# EAGLE board devboard_kw2xd_v2.0 (EAGLE 8.4.1)
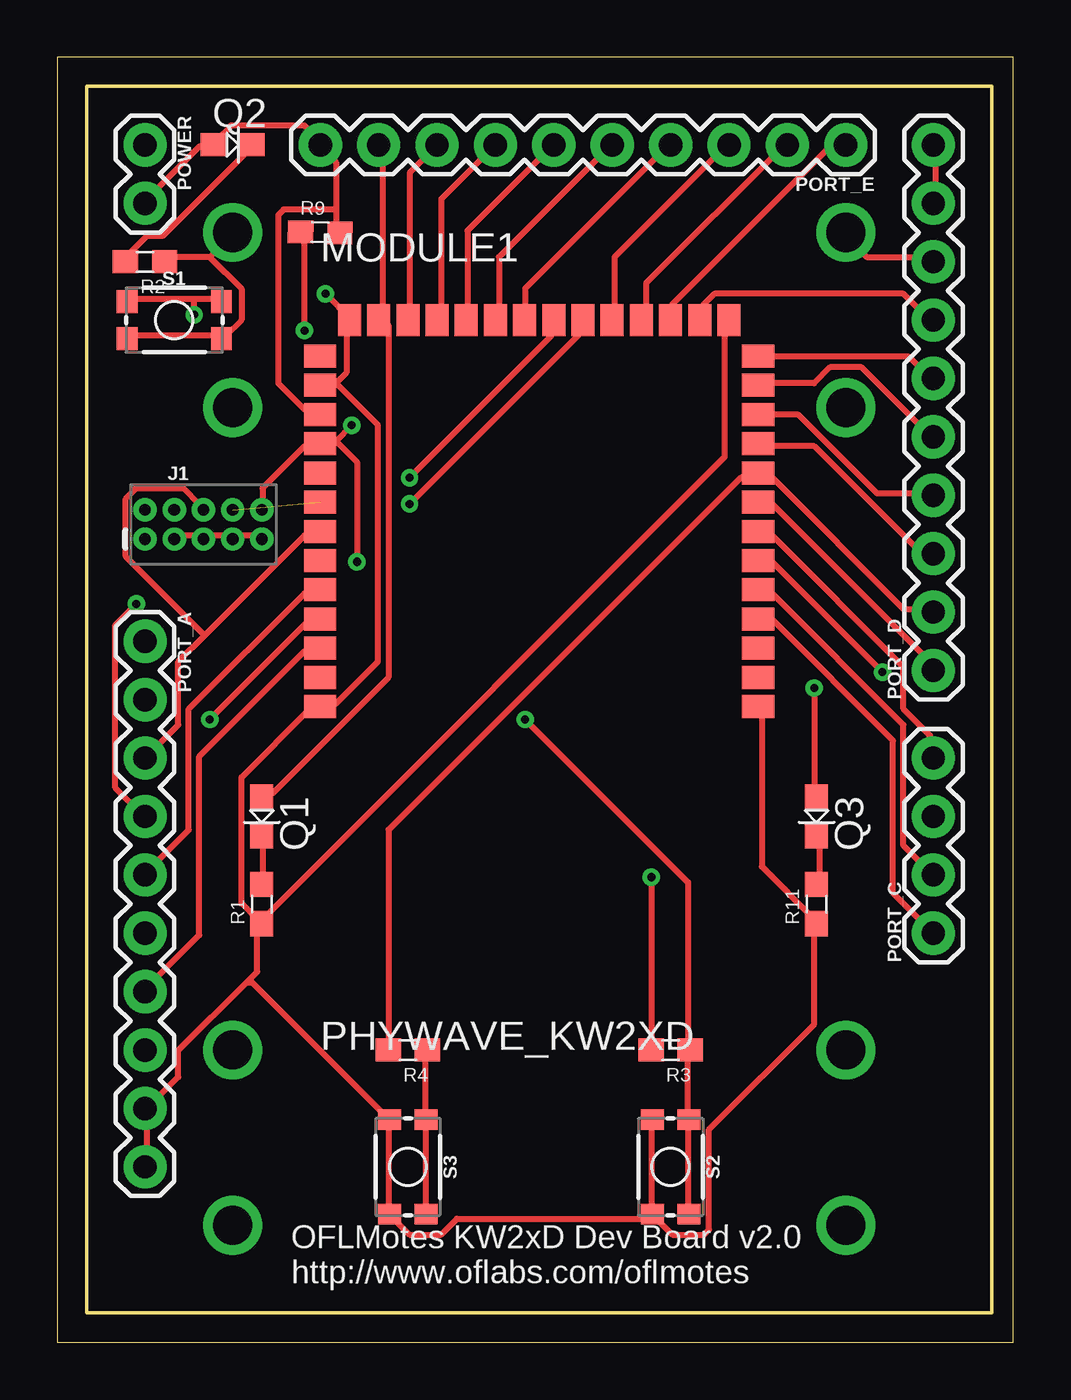
[diagram p0: board, top side]
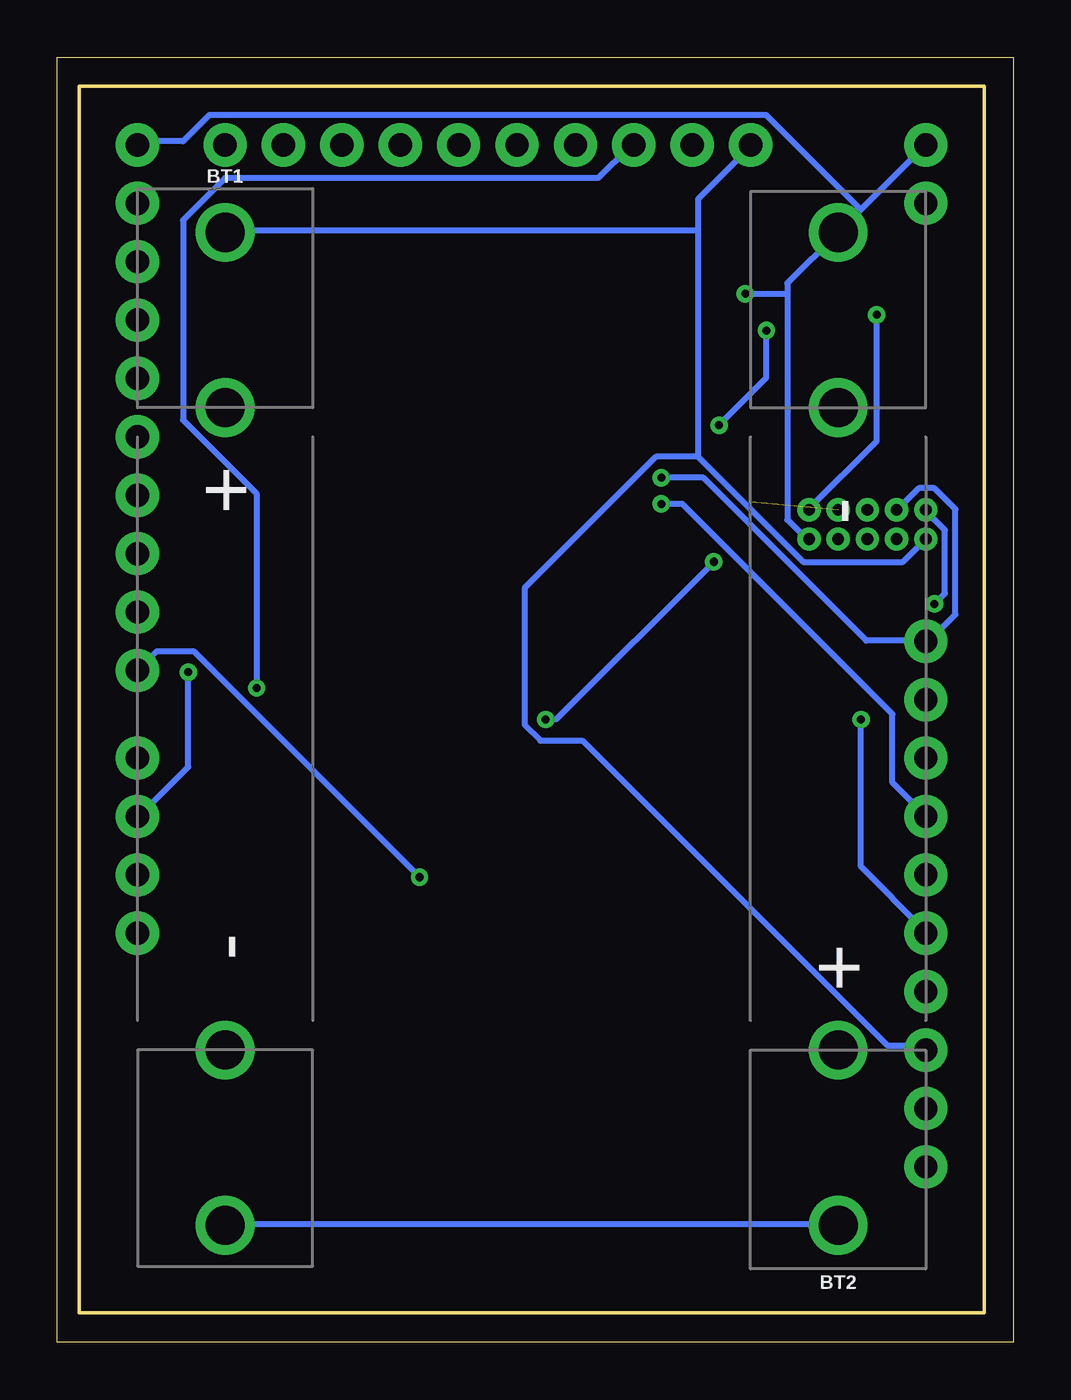
[diagram p1: board, bottom side, seen from below]

Size 41.58 x 55.87 mm. Coordinates in mm from the lower left corner, seen from the top.
Outline: 0,0 41.58,0 41.58,55.87 0,55.87 0,0
Outline: 1.27,54.61 40.64,54.61 40.64,1.27 1.27,1.27 1.27,54.61
Copper layers (1*16): Top 0.035mm / dielectric 1.5mm / Bottom 0.035mm
Design rules "default *": minimum track width 10mil, minimum drill 0.35mm, track to track 8mil, track to pad 8mil, pad to pad 8mil, via to via 8mil, smd to smd 8mil, copper to edge 40mil, drill to drill 10mil, minimum pad ring 10mil, minimum via ring 8mil, stop-mask expansion 4mil, vias tented up to drill 0mil, thermal gap 10mil

## Footprints (pad centres in the part's own frame; a part is rotated, then mirrored left to right if it is on the bottom)
BATTERY-AAA = drill 1.702: GND@1 21.59,0; GND@2 13.97,0; PWR@1 -21.59,0; PWR@2 -13.97,0
2X5-PTH-1.27MM = drill 0.508 pad 1: 1 -2.54,-0.635; 2 -2.54,0.635; 3 -1.27,-0.635; 4 -1.27,0.635; 5 0,-0.635; 6 0,0.635; 7 1.27,-0.635; 8 1.27,0.635; 9 2.54,-0.635; 10 2.54,0.635
PHYWAVE_KW2XD = smd 1.4 x 1: 1 19.05,-0.3; 2 19.05,0.97; 3 19.05,2.24; 4 19.05,3.51; 5 19.05,4.78; 6 19.05,6.05; 7 19.05,7.32; 8 19.05,8.59; 9 19.05,9.86; 10 19.05,11.13; 11 19.05,12.4; 12 19.05,13.67; 13 19.05,14.94; 28 0,14.94; 29 0,13.67; 30 0,12.4; 31 0,11.13; 32 0,9.86; 33 0,8.59; 34 0,7.32; 35 0,6.05; 36 0,4.78; 37 0,3.51; 38 0,2.24; 39 0,0.97; 40 0,-0.3 | smd 1 x 1.4: 14 17.78,16.51; 15 16.51,16.51; 16 15.24,16.51; 17 13.97,16.51; 18 12.7,16.51; 19 11.43,16.51; 20 10.16,16.51; 21 8.89,16.51; 22 7.62,16.51; 23 6.35,16.51; 24 5.08,16.51; 25 3.81,16.51; 26 2.54,16.51; 27 1.27,16.51
1X10 = drill 1.016 pad 1.88: 1 0,0; 2 2.54,0; 3 5.08,0; 4 7.62,0; 5 10.16,0; 6 12.7,0; 7 15.24,0; 8 17.78,0; 9 20.32,0; 10 22.86,0
1X04 = drill 1.016 pad 1.88: 1 0,0; 2 2.54,0; 3 5.08,0; 4 7.62,0
1X02 = drill 1.016 pad 1.88: 1 0,0; 2 2.54,0
LED0603 = smd 1.1 x 1: A -0.85,0; C 0.85,0
SMD0603 = smd 1.1 x 1: 1 -0.85,0; 2 0.85,0
TACTILE_SWITCH_SMD_4.6X2.8MM = smd 0.9 x 1: 1 -2.05,-0.8; 2 2.05,-0.8; 3 2.05,0.8; 4 -2.05,0.8

## Placement (x,y rotation side)
BT1  [BATTERY-AAA]  34.29,26.67 270 bottom
BT2  [BATTERY-AAA]  7.62,26.67 90 bottom
J1  CORTEX_DEBUG_PTH  [2X5-PTH-1.27MM]  6.35,35.56 0 top
MODULE1  PHYWAVE_KW2XD  [PHYWAVE_KW2XD]  11.43,27.94 0 top
PORT_A  [1X10]  3.81,30.48 270 top
PORT_C  [1X04]  38.1,17.78 90 top
PORT_D  [1X10]  38.1,29.21 90 top
PORT_E  [1X10]  34.29,52.07 180 top
POWER  [1X02]  3.81,52.07 270 top
Q1  RED  [LED0603]  8.89,22.86 270 top
Q2  RED  [LED0603]  7.62,52.07 0 top
Q3  GREEN  [LED0603]  33.02,22.86 270 top
R1  220  [SMD0603]  8.89,19.05 90 top
R2  220  [SMD0603]  3.81,46.99 180 top
R3  56k  [SMD0603]  26.67,12.7 180 top
R4  56k  [SMD0603]  15.24,12.7 180 top
R9  56k  [SMD0603]  11.43,48.26 358.8 top
R11  220  [SMD0603]  33.02,19.05 90 top
S1  RESET  [TACTILE_SWITCH_SMD_4.6X2.8MM]  5.08,44.45 0 top
S2  KEY1  [TACTILE_SWITCH_SMD_4.6X2.8MM]  26.67,7.62 270 top
S3  KEY2  [TACTILE_SWITCH_SMD_4.6X2.8MM]  15.24,7.62 270 top

## Library data of the parts
BT1 BT2 = SparkFun-Batteries; PROD_ID: BATT-08571; SF_SKU: PRT-12718
J1 POWER = SparkFun-Connectors
MODULE1 = oflabs-phytec
PORT_A PORT_D PORT_E = SparkFun-Connectors; PROD_ID: CONN-11563
PORT_C = SparkFun-Connectors; PROD_ID: CONN-09696
Q1-Q3 R1-R4 R9 R11 = parts
S1-S3 = SparkFun-Switches; PROD_ID: SWCH-13065

## Nets
GND: BT2.GND@1 J1.3 J1.5 J1.7 J1.9 MODULE1.1 MODULE1.14 MODULE1.27 MODULE1.29 MODULE1.40 PORT_A.9 PORT_A.10 PORT_D.9 PORT_D.10 POWER.1 R1.1 R2.1 R11.1 S1.1 S1.2 S2.1 S2.2 S3.1 S3.2
N$1: Q1.C R1.2
N$2: Q2.C R2.2
N$3: BT1.GND@1 BT2.PWR@1
N$20: Q3.C R11.2
NRST: J1.10 MODULE1.31 R3.1 R9.1 S1.3 S1.4 S2.3 S2.4
NRST1: R4.1 S3.3 S3.4
PTA0_SWDCLK: J1.4 MODULE1.20 PORT_A.1
PTA1: PORT_A.2
PTA1_TDI: J1.8 MODULE1.33
PTA2_SWO: J1.6 MODULE1.34 PORT_A.3
PTA3_SWDIO: J1.2 MODULE1.19 PORT_A.4
PTA4: MODULE1.36 PORT_A.5
PTA18: MODULE1.37 PORT_A.6
PTA19: MODULE1.38 PORT_A.7
PTC4: MODULE1.4 PORT_C.1
PTC5: MODULE1.5 PORT_C.2
PTC6: MODULE1.6 PORT_C.3
PTC7: MODULE1.7 PORT_C.4
PTD1: MODULE1.8 PORT_D.1 R3.2
PTD2: MODULE1.9 PORT_D.2 R4.2
PTD3: MODULE1.10 PORT_D.3
PTD4: MODULE1.11 PORT_D.4
PTD5: MODULE1.12 PORT_D.5
PTD6: MODULE1.13 PORT_D.6
PTD7: MODULE1.15 PORT_D.7
PTE0: MODULE1.16 PORT_E.1
PTE1: MODULE1.17 PORT_E.2
PTE2: MODULE1.18 PORT_E.3
PTE3: MODULE1.21 PORT_E.4
PTE4: MODULE1.22 PORT_E.5
PTE16: MODULE1.23 PORT_E.6
PTE17: MODULE1.24 PORT_E.7
PTE18: MODULE1.25 PORT_E.8 Q3.A
PTE19: MODULE1.26 PORT_E.9 Q1.A
VCC: BT1.PWR@1 J1.1 MODULE1.30 PORT_A.8 PORT_D.8 PORT_E.10 POWER.2 Q2.A R9.2

## Tracks (layer width: path | path; a pad name or v marks a point on that pad's centre or on a via)
GND  (via drill 0.35)
  Top 0.254: PORT_D.9 38.18,49.71 38.18,51.99 PORT_D.10 | J1.3 5.26,35.08 6.17,35.08 J1.5 6.4,35.08 7.54,35.08 J1.7 7.77,35.08 8.69,35.08 J1.9 | S1.1 3.2,43.76 7.09,43.76 S1.2 7.32,43.76 8,44.45 8,45.82 6.63,47.19 | 6.63,47.19 4.8,47.19 R2.1 | 6.63,47.19 7.54,48.11 BT2.GND@1 | MODULE1.1 30.63,27.53 30.63,20.68 32.92,18.39 R11.1 32.92,18.16 32.92,13.82 28.35,9.25 28.35,4.9 28.12,4.67 26.75,4.67 26.06,5.36 S2.2 | 12.12,41.71 11.43,41.71 MODULE1.29 12.12,41.71 | 12.12,41.71 12.57,42.16 12.57,44.45 MODULE1.27 12.8,44.45 v11.66,45.59 | S2.2 25.83,5.59 25.83,9.47 S2.1 | 8.23,15.65 5.26,12.68 5.26,11.53 3.89,10.16 | 8.23,15.65 8.69,16.1 8.69,18.16 R1.1 | R1.1 8.69,18.39 8,19.07 8,24.56 10.97,27.53 11.43,27.53 MODULE1.40 11.43,27.76 12.12,27.76 13.95,29.59 13.95,39.88 12.12,41.71 | MODULE1.14 29.03,44.45 29.03,38.51 8.91,18.39 R1.1 | 8.23,15.65 8.46,15.65 14.4,9.7 S3.1 14.4,9.47 14.4,5.59 S3.2 14.63,5.36 15.32,4.67 16.69,4.67 17.37,5.36 25.83,5.36 S2.2 | 3.89,10.16 3.89,7.64 PORT_A.10 | 3.89,10.16 PORT_A.9
  Bottom 0.254: 9.83,45.59 9.83,46.05 BT2.GND@1 6.63,49.25 | 9.83,45.59 9.83,35.76 9.14,35.08 8.91,35.08 J1.9 | 6.63,49.25 POWER.1 | 6.63,49.25 10.74,53.37 34.98,53.37 36.12,52.22 37.95,52.22 PORT_D.10 | v11.66,45.59 9.83,45.59
N$1
  Top 0.254: R1.2 8.91,19.99 8.91,21.82 Q1.C
N$2
  Top 0.254: R2.2 2.97,47.19 3.89,48.11 4.57,48.11 8.46,51.99 Q2.C
N$3
  Bottom 0.254: BT2.PWR@1 7.77,5.13 34.29,5.13 BT1.GND@1
N$20
  Top 0.254: R11.2 33.15,19.99 33.15,21.82 Q3.C
NRST  (via drill 0.35)
  Top 0.254: S2.3 27.43,5.59 27.43,9.47 S2.4 27.43,9.7 27.43,12.68 R3.1 27.43,12.9 27.43,19.99 v20.34,27.08 | 5.94,45.36 7.09,45.36 S1.3 | 5.94,45.36 3.2,45.36 S1.4 | v10.74,43.99 10.74,48.11 R9.1 | 12.12,39.19 v12.8,39.88 | 12.12,39.19 11.43,39.19 MODULE1.31 | J1.10 8.91,36.22 8.91,37.14 10.74,38.96 11.43,38.96 MODULE1.31 | v5.94,44.68 5.94,45.36 | v13.03,33.93 13.03,38.28 12.12,39.19 | 12.12,39.19 MODULE1.31
  Bottom 0.254: v10.74,43.99 10.74,41.94 v12.8,39.88 | v5.94,44.68 5.94,39.19 8.91,36.22 J1.10 | v20.34,27.08 19.89,27.08 v13.03,33.93
NRST1
  Top 0.254: S3.3 16,5.59 16,9.47 S3.4 16,9.7 16,12.68 R4.1
PTA0_SWDCLK  (via drill 0.35)
  Top 0.254: v15.32,37.59 21.49,43.76 21.49,44.45 MODULE1.20
  Bottom 0.254: v15.32,37.59 13.49,37.59 6.4,30.5 3.89,30.5 PORT_A.1 3.66,30.5 2.52,31.65 2.52,36.22 3.43,37.14 4.12,37.14 5.03,36.22 J1.4
PTA1_TDI  (1 unrouted)
PTA2_SWO
  Top 0.254: 6.4,30.73 5.26,29.59 5.26,26.85 PORT_A.3 | 6.4,30.73 10.74,35.08 11.43,35.08 MODULE1.34 | 6.4,30.73 2.97,34.16 2.97,36.68 3.43,37.14 5.49,37.14 6.17,36.45 6.17,36.22 J1.6
PTA3_SWDIO  (via drill 0.35)
  Top 0.254: MODULE1.19 22.86,43.99 v15.32,36.45 | v3.43,32.11 2.52,31.19 2.52,24.11 3.66,22.96 PORT_A.4
  Bottom 0.254: v15.32,36.45 14.4,36.45 5.26,27.31 5.26,24.33 3.89,22.96 PORT_A.4 | v3.43,32.11 2.97,32.56 2.97,35.31 3.66,35.99 J1.2
PTA4
  Top 0.254: MODULE1.36 11.43,32.56 10.74,32.56 5.71,27.53 5.71,22.28 3.89,20.45 PORT_A.5
PTA18  (via drill 0.35)
  Top 0.254: v6.63,27.08 10.97,31.42 11.43,31.42 MODULE1.37
  Bottom 0.254: v6.63,27.08 6.63,20.68 3.89,17.93 PORT_A.6
PTA19
  Top 0.254: MODULE1.38 11.43,30.05 10.74,30.05 6.17,25.48 6.17,17.7 3.89,15.42 PORT_A.7
PTC4
  Top 0.254: PORT_C.1 36.35,19.53 36.35,26.16 31.09,31.42 30.63,31.42 MODULE1.4
PTC5
  Top 0.254: MODULE1.5 30.63,32.56 31.09,32.56 36.8,26.85 36.8,21.59 37.95,20.45 PORT_C.2
PTC6  (via drill 0.35)
  Top 0.254: v35.89,29.13 31.09,33.93 30.63,33.93 MODULE1.6
  Bottom 0.254: v35.89,29.13 35.89,25.02 37.95,22.96 PORT_C.3
PTC7
  Top 0.254: MODULE1.7 30.63,35.08 31.09,35.08 36.8,29.36 36.8,27.53 37.95,26.39 37.95,25.48 PORT_C.4
PTD1  (via drill 0.35)
  Top 0.254: v25.83,20.22 25.83,12.9 R3.2 | MODULE1.8 30.63,36.45 31.09,36.45 38.18,29.36 PORT_D.1
  Bottom 0.254: v25.83,20.22 35.66,30.05 37.26,30.05 PORT_D.1
PTD2
  Top 0.254: R4.2 14.4,12.9 14.4,22.28 29.72,37.59 30.4,37.59 MODULE1.9 30.63,37.59 31.09,37.59 36.8,31.88 37.95,31.88 PORT_D.2
PTD3
  Top 0.254: MODULE1.10 30.63,38.96 32.92,38.96 37.49,34.39 37.95,34.39 PORT_D.3
PTD4
  Top 0.254: MODULE1.11 30.63,40.34 32.23,40.34 35.66,36.91 37.95,36.91 PORT_D.4
PTD5
  Top 0.254: MODULE1.12 30.63,41.71 32.92,41.71 33.6,42.39 34.98,42.39 37.95,39.42 PORT_D.5
PTD6
  Top 0.254: MODULE1.13 30.63,42.85 37.03,42.85 37.95,41.94 PORT_D.6
PTD7
  Top 0.254: MODULE1.15 28.12,44.45 28.12,45.14 28.57,45.59 36.8,45.59 37.95,44.45 PORT_D.7
PTE0
  Top 0.254: MODULE1.16 26.75,44.45 26.75,45.14 33.6,51.99 34.29,51.99 PORT_E.1
PTE1
  Top 0.254: MODULE1.17 25.6,44.45 25.6,46.05 31.55,51.99 PORT_E.2
PTE2
  Top 0.254: MODULE1.18 24.23,44.45 24.23,47.19 29.03,51.99 PORT_E.3
PTE3
  Top 0.254: MODULE1.21 20.34,44.45 20.34,45.82 26.52,51.99 PORT_E.4
PTE4
  Top 0.254: MODULE1.22 19.2,44.45 19.2,47.19 24,51.99 PORT_E.5
PTE16
  Top 0.254: MODULE1.23 17.83,44.45 17.83,48.34 21.49,51.99 PORT_E.6
PTE17
  Top 0.254: PORT_E.7 16.69,49.71 16.69,44.45 MODULE1.24
PTE18  (via drill 0.35)
  Top 0.254: v32.92,28.45 32.92,23.88 Q3.A | MODULE1.25 15.32,44.45 15.32,50.85 16.46,51.99 PORT_E.8
  Bottom 0.254: v32.92,28.45 32.92,36.91 36.12,40.11 36.12,48.79 34.29,50.62 18.06,50.62 16.69,51.99 PORT_E.8
PTE19
  Top 0.254: 14.17,44.45 14.4,44.22 14.4,28.9 9.37,23.88 8.91,23.88 Q1.A | 14.17,44.45 14.17,51.99 PORT_E.9 | 14.17,44.45 MODULE1.26
VCC
  Top 0.254: PORT_D.8 37.95,47.19 35.2,47.19 34.29,48.11 BT1.PWR@1 | POWER.2 3.89,49.71 6.17,51.99 6.63,51.99 Q2.A 6.86,52.22 7.54,52.91 10.74,52.91 11.43,52.22 PORT_E.10 11.43,51.99 12.12,51.31 12.12,49.25 | 12.12,49.25 12.12,48.34 R9.2 | 12.12,49.25 9.83,49.25 9.6,49.02 9.6,41.71 10.74,40.56 11.43,40.56 MODULE1.30
  Bottom 0.254: J1.1 4.8,33.93 9.14,33.93 13.72,38.51 | 13.72,48.34 13.72,49.71 11.43,51.99 PORT_E.10 | 13.72,48.34 13.72,38.51 | 13.72,38.51 15.54,38.51 21.26,32.79 21.26,26.85 20.57,26.16 18.75,26.16 5.49,12.9 3.89,12.9 PORT_A.8 | 13.72,48.34 34.29,48.34 BT1.PWR@1

## Text on the board
tNames: OFLMotes KW2xD Dev Board v2.0 / http://www.oflabs.com/oflmotes